# Altium PCB XBee_breakout.PcbDoc
Units mm, origin at the board's own origin, x right, y up, seen from the top; angles counter-clockwise.
Board outline 16.8 x 24.04 mm, 2 copper layers (Top Layer, Bottom Layer); 5 components, 12 nets, 55 pads, 24 vias.
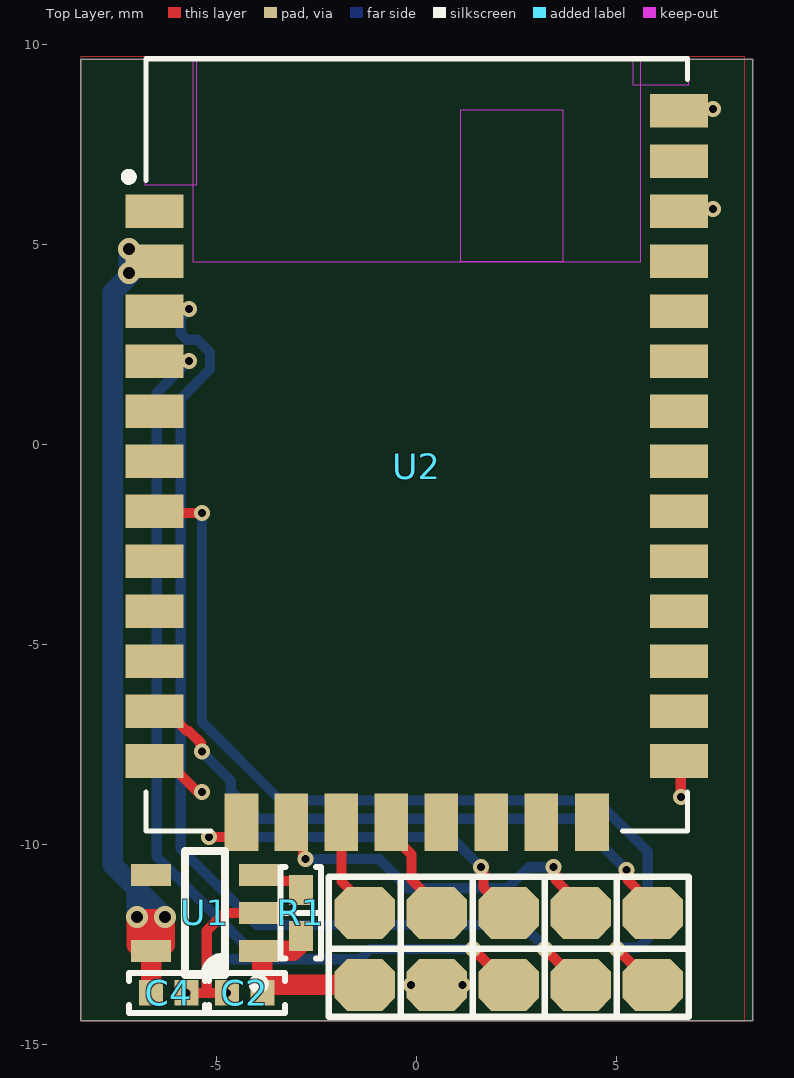
[diagram p0: Top Layer view]
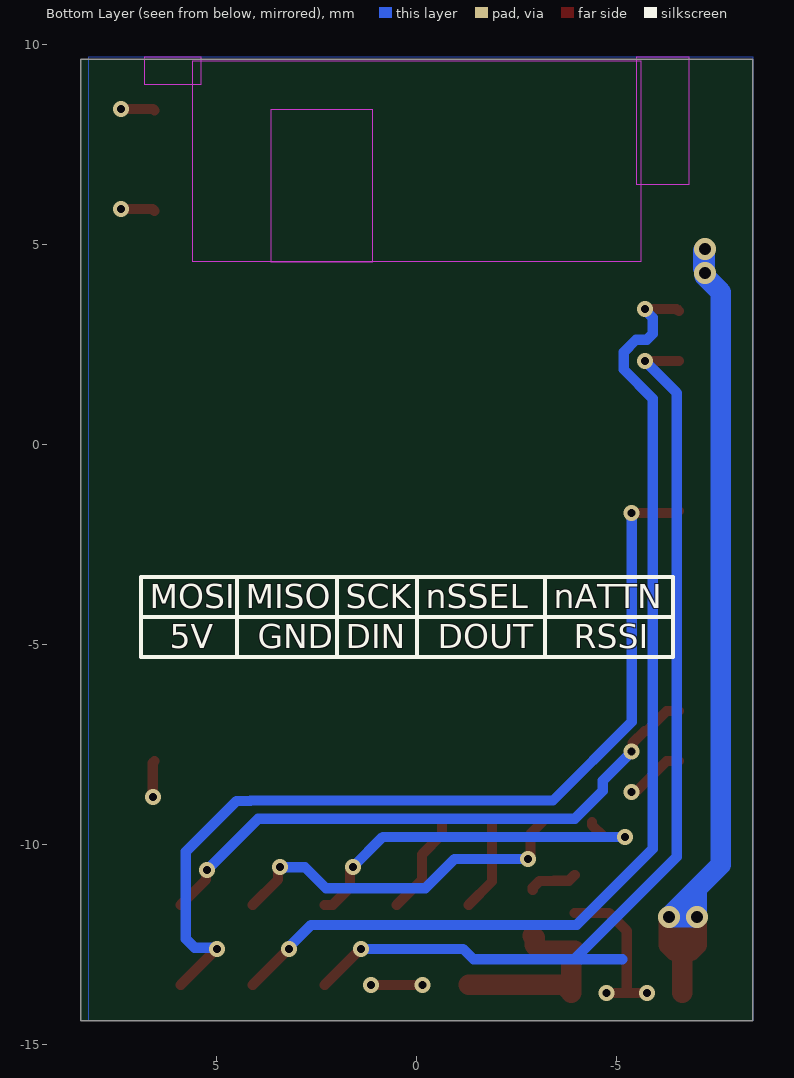
[diagram p1: Bottom Layer view, seen from below]

## Layer stack, top to bottom
Top Solder: solder mask 0.0102, Solder Resist, Dk 3.5
Top Layer: signal copper 0.0356
Dielectric 1: dielectric 0.32, FR-4, Dk 4.8
Bottom Layer: signal copper 0.0356
Bottom Solder: solder mask 0.0102, Solder Resist, Dk 3.5

## Board outline
-8.4,-14.4 -8.4,9.645 8.4,9.645 8.4,-14.4

## Design rules (kind name [scope] priority, off if disabled: settings)
BoardOutlineClearance [All] p1: gap=0.2 ignorepadtopadclearanceinfootprint=FALSE
Clearance "PolyGon Pour Clearance" [InPolygon] p1: gap=0.2 ignorepadtopadclearanceinfootprint=FALSE
Clearance [All] p2: gap=0.2 ignorepadtopadclearanceinfootprint=TRUE except(0: Arc-Hole Track-Hole SMDPad-Hole THPad-Hole Via-Hole Fill-Hole Poly-Hole Region-Hole Text-Hole)
HoleSize [All] p1: absolutevalues=TRUE maxlimit=6.3 minlimit=0.02 maxpercent=80.000 minpercent=20.000
PolygonConnect PolygonRelief [IsPolygon and not (IsNamedPolygon('PolygonDirect'))] p1: thpad.connectstyle=Relief thpad.reliefconductorwidth=0.254 thpad.reliefentries=4 thpad.polygonreliefangle="90 Angle" thpad.airgapwidth=0.254 smdpad.connectstyle=Relief smdpad.reliefconductorwidth=0.254 smdpad.reliefentries=4 smdpad.polygonreliefangle="90 Angle" smdpad.airgapwidth=0.254 via.connectstyle=Direct via.reliefconductorwidth=0.254 via.reliefentries=4 via.polygonreliefangle="90 Angle" via.airgapwidth=0.254
PolygonConnect [All] p2: connectstyle=Direct reliefconductorwidth=0.254 reliefentries=4 polygonreliefangle="90 Angle" airgapwidth=0.254
RoutingVias [All] p1: holewidth=0.3 width=0.55 viastyle="Through Hole" minholewidth=0.2 minwidth=0.4 maxholewidth=0.7 maxwidth=1.27
SolderMaskExpansion [All] p1: expansion=0.102 istentingtop=FALSE
Width [All] p1: maxlimit=0.712 minlimit=0.127 preferedwidth=0.254
29 further rules are at their usual default settings.

## Components (designator, comment, footprint, x,y, rotation, side; value= is the part's Value field where it differs from the comment)
C2 "0.1 µF" "CAP 0402_1005" -4.3,-13.7 r0 top
C4 "1 µF" "CAP 0402_1005" -6.2,-13.7 r180 top
R1 "10k Ohms" "RES 0402_1005" -2.9,-11.7 r270 top
U1 "MIC5504" "TI SOT-23-5 DBV" -5.3,-11.7 r180 top
U2 "XB3-24Z8UM-J" XCVR_XB3-24Z8UM-J 0,0 r0 top

## Footprints (in the part's own frame and the unit in brackets; to place one, negate y for a bottom-side part, rotate by r counter-clockwise, add the part's x,y. Pads: shape width x height; smd on the part's side, far side on the other; paste and mask are expansions set on the pad)
"CAP 0402_1005" [mm] "Chip Capacitor, 2-Leads, Body 1.02x0.51mm, IPC Medium Density"
  rect 0.6x0.64 smd: 1(-0.44,0) 2(0.44,0)
  silkscreen extent -1,-0.5 1,0.5, body extent -0.5,-0.26 0.5,0.26, height 0.52
"RES 0402_1005" [mm] "Chip Resistor, 2-Leads, Body 1.0x0.5mm, IPC Medium Density"
  rect 0.75x0.6 smd: 1(-0.575,0) 2(0.575,0)
  silkscreen extent -1.14,-0.51 1.14,0.51, body extent -0.5,-0.25 0.5,0.25, height 0.35
"TI SOT-23-5 DBV" [mm] "SOT23, 5-Leads, Body 2.90x2.80mm, Pitch 0.95mm, IPC Medium Density"
  rect 1x0.55 smd: 1(-1.35,0.95) 2(-1.35,0) 3(-1.35,-0.95) 4(1.35,-0.95) 5(1.35,0.95)
  silkscreen extent -1.48,-1.55 0.5,1.9, body extent -1.44,-1.43 1.39,1.48, height 1.5
XCVR_XB3-24Z8UM-J [mil]
  rect 57x33 smd: 1(-258,230) 2(-258,180.8) 3(-258,131.6) 4(-258,82.4) 5(-258,33.2) 6(-258,-16) 7(-258,-65.2) 8(-258,-114.4) 9(-258,-163.6) 10(-258,-212.8) 11(-258,-262) 12(-258,-311.2) 21(258,-311.2) 22(258,-262) 23(258,-212.8) 24(258,-163.6) 25(258,-114.4) 26(258,-65.2) 27(258,-16) 28(258,33.2) 29(258,82.4) 30(258,131.6) 31(258,180.8) 32(258,230) 33(258,279.2) 34(258,329)
  rect 33x57 smd: 13(-172.5,-371.5) 14(-123.3,-371.5) 15(-74.1,-371.5) 16(-24.9,-371.5) 17(24.3,-371.5) 18(73.5,-371.5) 19(122.7,-371.5) 20(172.5,-371.5)
  Keep-Out Layer region: 143.5,180 43.5,180 43.5,330 143.5,330
  silkscreen extent -287,-380 266,380, body extent -267,-380 267,380, height 97

## Part data
C2: library part C0402C104K4RACAUTO, "CAP CER 0.1UF 16V X7R 0402", Device Package="0402 (1005 Metric)", Manufacturer=KEMET, Operating Temperature="-55°C ~ 125°C", Ratings=AEC-Q200, Supplier Part Number 1=399-6828-1-ND, Temperature Coefficient=X7R, Tolerance=±10%, Voltage - Rated=16V, Applications="Automotive, Bypass, Decoupling", Capacitance="0.1 µF", ComponentLink1Description=Datasheet, ComponentLink1URL=https://api.kemet.com/component-edge/download/specsheet/C0402C104K4RACAUTO.pdf, ComponentLink2Description="DigiKey Link", ComponentLink2URL=https://www.digikey.com/en/products/detail/kemet/C0402C104K4RACAUTO/3314827, LastUpdated="8/14/2022 9:05:51 PM", Lifecycle Status=Active, Minimum Order=1, Mounting Type="Surface Mount, MLCC", Package / Case="0402 (1005 Metric)", Packaging=TapeAndReel, Part Number=C0402C104K4RACAUTO, Part Status=Active, PartId=3024, Price=0.01, Series="SMD Auto X7R", Size / Dimension="0.039\" L x 0.020\" W (1.00mm x 0.50mm)", Supplier 1=DigiKey, Thickness (Max)="0.022\" (0.55mm)"
C4: library part C0402C104K4RACAUTO, "CAP CER 0.1UF 16V X7R 0402", Capacitance="0.1 µF", Device Package="0402 (1005 Metric)", Manufacturer=KEMET, Operating Temperature="-55°C ~ 125°C", Ratings=AEC-Q200, Supplier Part Number 1=399-6828-1-ND, Temperature Coefficient=X7R, Tolerance=±10%, Voltage - Rated=16V, Applications="Automotive, Bypass, Decoupling", ComponentLink1Description=Datasheet, ComponentLink1URL=https://api.kemet.com/component-edge/download/specsheet/C0402C104K4RACAUTO.pdf, ComponentLink2Description="DigiKey Link", ComponentLink2URL=https://www.digikey.com/en/products/detail/kemet/C0402C104K4RACAUTO/3314827, LastUpdated="8/14/2022 9:05:51 PM", Lifecycle Status=Active, Minimum Order=1, Mounting Type="Surface Mount, MLCC", Package / Case="0402 (1005 Metric)", Packaging=TapeAndReel, Part Number=C0402C104K4RACAUTO, Part Status=Active, PartId=3024, Price=0.01, Series="SMD Auto X7R", Size / Dimension="0.039\" L x 0.020\" W (1.00mm x 0.50mm)", Supplier 1=DigiKey, Thickness (Max)="0.022\" (0.55mm)"
R1: library part CRCW0402330RJNEDC, "RES 330 OHM 5% 1/16W 0402", Device Package="0402 (1005 Metric)", Manufacturer="Vishay Dale", Operating Temperature="-55°C ~ 155°C", Power (Watts)="0.063W, 1/16W", Resistance="330 Ohms", Supplier Device Package=0402, Supplier Part Number 1=541-4123-1-ND, Temperature Coefficient=±200ppm/°C, Tolerance=±5%, ComponentLink1Description=Datasheet, ComponentLink1URL=http://www.vishay.com/docs/28773/crcwce3.pdf, ComponentLink2Description="DigiKey Link", ComponentLink2URL=https://www.digikey.com/en/products/detail/vishay-dale/CRCW0402330RJNEDC/7928545, Composition="Thick Film", Height - Seated (Max)="0.014\" (0.35mm)", LastUpdated="8/14/2022 9:23:31 PM", Lifecycle Status=Active, Minimum Order=1, Number of Terminations=2, Package / Case="0402 (1005 Metric)", Packaging=CutTape, Part Number=CRCW0402330RJNEDC, Part Status=Active, PartId=15989, Price=0.01, Series=CRCW-C, Size / Dimension="0.039\" L x 0.020\" W (1.00mm x 0.50mm)", Supplier 1=DigiKey
U1: library part MIC5504-3.3YM5, "3.3V LDO"
U2: "802.15.4 Zigbee Transceiver Module 2.4GHz Antenna Not Included, U.FL Surface Mount", Package="SMD-34 Digi International", Availability=Unavailable, MF="Digi International", MP=XB3-24Z8UM-J, Price=None, SnapEDA_Link=https://www.snapeda.com/parts/XB3-24Z8UM-J/Digi%20International/view-part/2762908/?ref=snap

## Free pads (board coordinates)
  oct 1.524x1.3 smd: 4(-1.3,-13.5) 4(-1.3,-11.7) 4(0.5,-13.5) 4(0.5,-11.7) 4(2.3,-13.5) 4(2.3,-11.7) 4(4.1,-13.5) 4(4.1,-11.7) 4(5.9,-13.5) 4(5.9,-11.7)

## Via types
v1: diameter 0.4, hole 0.2, Top Layer to Bottom Layer, tented both sides, 20 vias
v2: diameter 0.55, hole 0.3, Top Layer to Bottom Layer, tented both sides, 4 vias

## Nets (pads, with @x,y where several pads share a name; then routed paths per layer and width w, separated by ;. In a path a pad name is that pad's centre, name@x,y a point inside that pad or via, vN(x,y) a via of type N, cw(c..) or ccw(c..) an arc to the next point about the centre after c; other vN are vias at no path point)
3V3: C4.2 U1.5 U2.2 | length 24.9
  Top Layer w0.512: C4.2 -6.64,-12.66 U1.5 ; -7,-12.151 v2(-7,-11.8) -6.943,-11.857 -6.693,-11.857 ; -7,-12.151 -7,-12.502 -6.852,-12.65 U1.5 ; -7,-12.151 -6.65,-12.151 ; -6.693,-11.857 -6.443,-11.857 -6.4,-11.9 v2(-6.3,-11.8) -6.3,-12.151 ; -6.693,-11.857 -6.65,-11.9 -6.65,-12.151 ; U1.5 -6.65,-12.151 ; U1.5 -6.448,-12.65 -6.3,-12.502 -6.3,-12.151 ; -6.65,-12.151 -6.3,-12.151
  Bottom Layer w0.512: v2@-7.2,4.22 -7.6,3.82 -7.6,-10.5 -7,-11.1 ; v2(-7.2,4.3) v2@-7.2,4.38 ; v2@-7.2,4.38 -7.2,4.665 v2(-7.2,4.9) -7.2,4.89 -7.166,4.855 -7.166,4.415 v2@-7.2,4.38 ; -7,-11.1 v2(-7,-11.8) -6.988,-11.812 -6.312,-11.812 v2(-6.3,-11.8) -7,-11.1
5V: C2.2 pad.4@-1.3,-13.5 R1.2 U1.1 | length 5
  Top Layer w0.512: C2.2 C2.2@-3.86,-13.68 ; R1.2 -2.944,-12.319 -2.944,-12.494 -3.1,-12.65 U1.1 -3.86,-12.74 C2.2@-3.86,-13.68 ; pad.4@-1.3,-13.5 -3.68,-13.5 C2.2@-3.86,-13.68
DIN: pad.4@2.3,-13.5 U2.4 | length 25.1
  Top Layer w0.254: U2.4 -6.546,2.1 v1(-5.7,2.1) ; v1(1.4,-12.6) pad.4@2.3,-13.5
  Bottom Layer w0.254: v1(-5.7,2.1) -6.5,1.3 -6.5,-10.3 -3.938,-12.862 ; -5.138,-12.862 -3.938,-12.862 ; v1(1.4,-12.6) -1.158,-12.6 -1.42,-12.862 -3.938,-12.862
DOUT: pad.4@4.1,-13.5 U2.3 | length 26.7
  Top Layer w0.254: U2.3 -6.496,3.4 v1(-5.7,3.4) ; v1(3.2,-12.6) pad.4@4.1,-13.5
  Bottom Layer w0.254: v1(-5.7,3.4) -5.7,3.378 -5.9,3.178 -5.9,2.776 -5.751,2.627 -5.482,2.627 -5.173,2.318 -5.173,1.882 -5.9,1.155 -5.9,-10.1 -4,-12 2.638,-12 3.2,-12.562 v1(3.2,-12.6)
GND: C2.1 C4.1 pad.4@0.5,-13.5 U1.2 U2.1 U2.10 U2.12 U2.21 U2.32 U2.34 | length 9.5
  Top Layer w0.254: U2.12 -6.248,-7.904 -5.506,-8.647 -5.401,-8.647 v1(-5.373,-8.675) ; v1(-5.76,-13.7) -5.25,-13.7 ; v1(-4.74,-13.7) -5.25,-13.7 ; U1.2 -4.8,-11.7 -5.25,-12.15 -5.25,-13.7 ; v1(-0.138,-13.5) v1(1.138,-13.5) ; U2.21 6.6,-7.951 v1(6.6,-8.8) ; U2.32 6.611,5.9 v1(7.4,5.9) ; U2.34 6.597,8.4 v1(7.4,8.4)
MISO: pad.4@0.5,-11.7 U2.16 | length 2.5
  Top Layer w0.254: U2.16 -0.632,-9.741 -0.135,-10.238 -0.135,-10.865 pad.4@0.5,-11.5
MOSI: pad.4@-1.3,-11.7 U2.15 | length 2.3
  Top Layer w0.254: U2.15 -1.882,-10.918 pad.4@-1.3,-11.5
nATTN: pad.4@5.9,-11.7 U2.11 | length 14.8
  Top Layer w0.254: U2.11 -6.248,-6.655 -5.745,-7.158 -5.694,-7.158 -5.401,-7.451 -5.401,-7.644 v1(-5.373,-7.672) ; v1(5.248,-10.632) 5.265,-10.649 5.265,-10.865 pad.4@5.9,-11.5
  Bottom Layer w0.254: v1(-5.373,-7.672) -4.65,-8.396 -4.65,-8.65 -3.954,-9.346 3.962,-9.346 v1(5.248,-10.632)
NetR1_1: R1.1 U1.3 | length 1.2
  Top Layer w0.254: U1.3 -3.802,-10.898 -3.43,-10.898 -3.428,-10.9 -3.073,-10.9 -2.9,-11.073 R1.1
nSSEL: pad.4@4.1,-11.7 U2.14 | length 9
  Top Layer w0.254: U2.14 -2.84,-9.728 -2.84,-10.249 -2.778,-10.31 v1(-2.778,-10.35) ; v1(3.42,-10.56) 3.42,-10.6 3.465,-10.644 3.465,-10.865 pad.4@4.1,-11.5
  Bottom Layer w0.254: v1(-2.778,-10.35) -0.95,-10.35 -0.213,-11.087 2.268,-11.087 2.795,-10.56 v1(3.42,-10.56)
RSSI: pad.4@5.9,-13.5 U2.7 | length 23.2
  Top Layer w0.254: U2.7 -6.509,-1.7 v1(-5.373,-1.7) ; v1(5,-12.6) pad.4@5.9,-13.5
  Bottom Layer w0.254: v1(-5.373,-1.7) -5.373,-6.927 -3.408,-8.892 4.15,-8.892 4.158,-8.9 4.5,-8.9 5.775,-10.175 5.775,-12.349 5.552,-12.572 5.028,-12.572 v1(5,-12.6)
SCK: pad.4@2.3,-11.7 U2.13 | length 9.5
  Top Layer w0.254: v1(-5.2,-9.8) -4.674,-9.8 -4.382,-9.508 U2.13 ; v1(1.6,-10.56) 1.6,-10.6 1.665,-10.665 1.665,-11.065 2.1,-11.5 pad.4@2.3,-11.5
  Bottom Layer w0.254: v1(-5.2,-9.8) 0.846,-9.8 v1@1.6,-10.554
pads on no net: U1.4 U2.5 U2.6 U2.8 U2.9 U2.17 U2.18 U2.19 U2.20 U2.22 U2.23 U2.24 U2.25 U2.26 U2.27 U2.28 U2.29 U2.30 U2.31 U2.33

## Polygon pours and split planes (outlines as drawn)
GND on Bottom Layer "NONET_L02_P000" (solid, shelved, pour order 0): -8.4,9.7 -8.4,-14.4 8.2,-14.4 8.2,9.7
GND on Top Layer "NONET_L01_P001" (solid, shelved, pour order 1): -8.4,9.7 -8.4,-14.4 8.2,-14.4 8.2,9.7

## Keep-outs
Keep-Out Layer:
  rectangle: 5.4,9 6.8,9.7
  rectangle: -6.8,6.5 -5.5,9.7
  rectangle: -5.6,4.572 5.6,9.6

## Silkscreen, mask and mechanical layers (free items; w line width, h text height)
Top Overlay:
  lines w0.17: -2.2,-12.6 6.8,-12.6 ; -0.4,-14.3 -0.4,-10.8 ; 1.4,-14.3 1.4,-10.8 ; 3.2,-14.3 3.2,-10.8 ; 5,-14.3 5,-10.8 ; -2.2,-14.3 -2.2,-10.8 6.8,-10.8 6.8,-14.3 -2.2,-14.3
Bottom Overlay:
  lines w0.1: -6.4,-4.3 6.9,-4.3 ; -3.2,-5.3 -3.2,-3.3 ; 0,-5.3 0,-3.3 ; 2,-5.3 2,-3.3 ; 4.5,-5.3 4.5,-3.3 ; -6.4,-5.3 -6.4,-3.3 6.9,-3.3 6.9,-5.3 -6.4,-5.3
  text "nATTN" at -3.42,-4.08 h0.6
  text "nSSEL" at -0.22,-4.08 h0.6
  text "SCK" at 1.78,-4.08 h0.6
  text "MISO" at 4.28,-4.08 h0.6
  text "MOSI" at 6.68,-4.08 h0.6
  text "RSSI" at -3.92,-5.08 h0.6
  text "DOUT" at -0.52,-5.08 h0.6
  text "DIN" at 1.78,-5.08 h0.6
  text "GND" at 3.98,-5.08 h0.6
  text "5V" at 6.18,-5.08 h0.6
Board:
  the board outline again, w0.254